# Altium PCB BREW_MONITOR.PcbDoc
Units mil, origin at the board's own origin, x right, y up, seen from the top; angles counter-clockwise.
Board outline 3680 x 1750 mil, 2 copper layers (Top Layer, Bottom Layer); 56 components, 50 nets, 168 pads, 11 vias.
Unrouted connection lines stored in the file: 36.
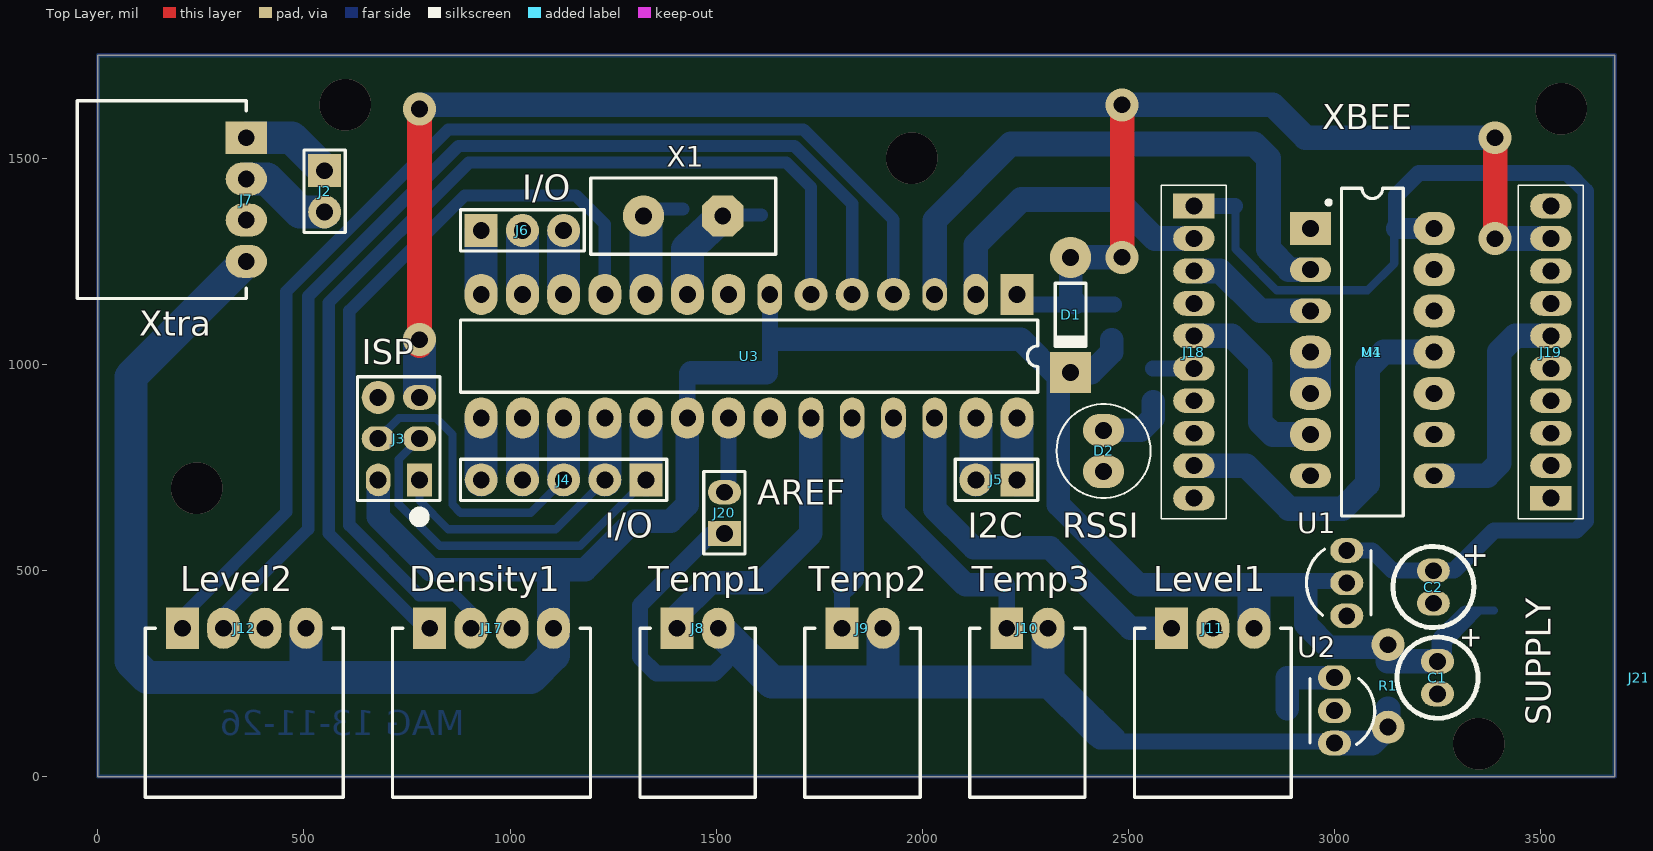
[diagram p0: Top Layer view]
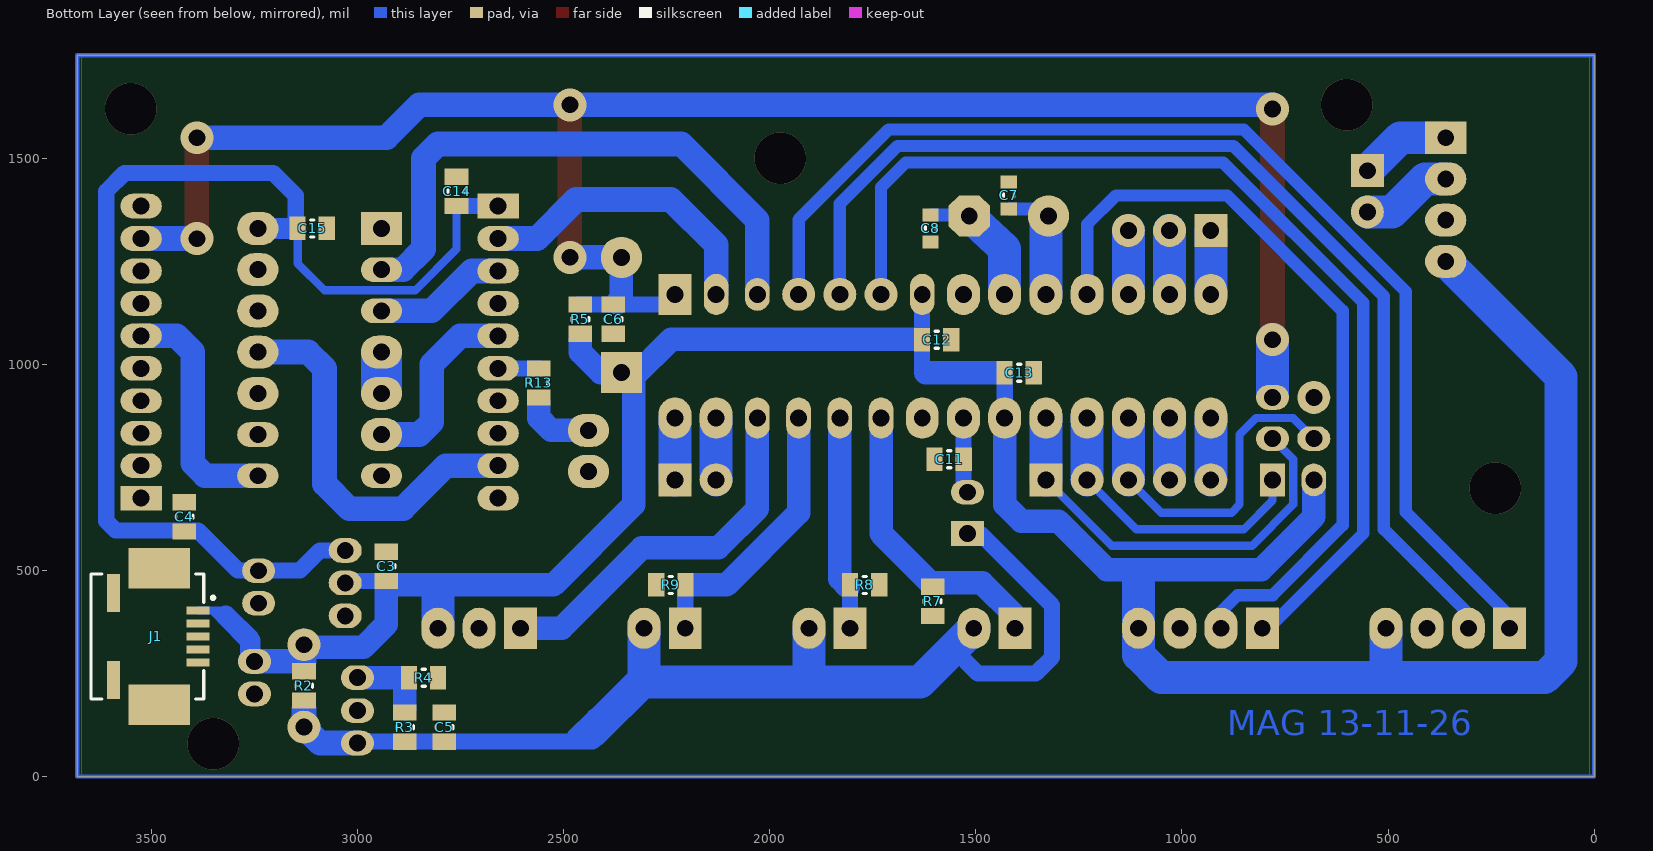
[diagram p1: Bottom Layer view, seen from below]

## Layer stack, top to bottom
Top Layer: signal copper 1.4
Dielectric: dielectric 12.6, FR-4, Dk 4.8
Bottom Layer: signal copper 1.4

## Board outline
0,0 0,1750 3680,1750 3680,0

## Design rules (kind name [scope] priority, off if disabled: settings)
Clearance Clearance_Exception [InComponent('J2')] p1: gap=10
Clearance [All] p2: gap=9
HoleSize [All] p1: absolutevalues=TRUE maxlimit=125 minlimit=10 maxpercent=80.000 minpercent=20.000
MinimumSolderMaskSliver MinimumSolderMaskSliver_Exception [InComponent('J1')] p1: minsoldermaskwidth=3
MinimumSolderMaskSliver [All] p2: minsoldermaskwidth=10
PlaneConnect [All] p1: planeconnectstyle=Relief reliefexpansion=20 reliefentries=4 reliefconductorwidth=20 reliefairgap=10
PolygonConnect [All] p1: connectstyle=Relief reliefconductorwidth=20 reliefentries=4 polygonreliefangle="90 Angle"
RoutingVias [All] p1: holewidth=41 width=50 viastyle="Through Hole" minholewidth=28 minwidth=40 maxholewidth=200 maxwidth=200
SilkToSilkClearance [All] p1: silktosilkclearance=5
SilkscreenOverComponentPads SilkscreenOverComponentPads_Res [InComponent('R*') OR InComponent('U2')] p1: minsilkscreentomaskgap=0
SilkscreenOverComponentPads [All] p2: minsilkscreentomaskgap=5
SolderMaskExpansion [All] p1: expansion=4
Width [All] p1: maxlimit=100 minlimit=10 preferedwidth=19.68
23 further rules are at their usual default settings.

## Components (designator, comment, footprint, x,y, rotation, side; value= is the part's Value field where it differs from the comment)
C1 "10uF, 35V" CAP_RAD-2.0 3250,240 r270 top
C2 "100uF, 25V" CAP_RAD-2.0 3240,460 r270 top
C3 "100nF, 50V" "0805 (2012 Metric)" 2930,510 r90 bottom
C4 "100nF, 50V" "0805 (2012 Metric)" 3420,630 r90 bottom
C5 "100nF, 50V" "0805 (2012 Metric)" 2790,120 r90 bottom
C6 "100nF, 50V" "0805 (2012 Metric)" 2380,1110 r270 bottom
C7 "20pF, 50V" "0603 (1608 Metric)" 1420,1410 r90 bottom
C8 "20pF, 50V" "0603 (1608 Metric)" 1610,1330 r270 bottom
C11 "100nF, 50V" "0805 (2012 Metric)" 1565,770 r0 bottom
C12 "100nF, 50V" "0805 (2012 Metric)" 1595,1060 r180 bottom
C13 "100nF, 50V" "0805 (2012 Metric)" 1395,980 r180 bottom
C14 "100nF, 50V" "0805 (2012 Metric)" 2760,1420 r90 bottom
C15 "100nF, 50V" "0805 (2012 Metric)" 3110,1330 r180 bottom
D1 "1N4148" DO-35 2360,1120 r270 top
D2 "LED (Yellow)" LED-1 2440,790 r90 top
J1 "USB-mini B" CON_USB-UX60SC 3510,340 r270 bottom
J2 "HDR-1X2" HDR1X2#1 550,1470 r270 top
J3 "HDR-2X3" HDR2X3 780,720 r90 top
J4 "HDR-1X5" HDR1X5 1330,720 r180 top
J5 "HDR-1X2" HDR1X2#1 2230,720 r180 top
J6 "HDR-1X3" HDR1X3 930,1325 r0 top
J7 "HDR-1X4" "HDR1X4_RA POL_SHR_TE" 360,1550 r270 top
J8 "HDR-1X2" "HDR1X2_RA POL_SHR_TE" 1405,360 r0 top
J9 "HDR-1X2" "HDR1X2_RA POL_SHR_TE" 1805,360 r0 top
J10 "HDR-1X2" "HDR1X2_RA POL_SHR_TE" 2205,360 r0 top
J11 "HDR-1X3" "HDR1X3_RA POL_SHR_TE" 2605,360 r0 top
J12 "HDR-1X4" "HDR1X4_RA POL_SHR_TE" 205,360 r0 top
J13 "HOUS-2" NO_FOOT -505,-380 r90 top
J14 "HOUS-2" NO_FOOT -285,-380 r90 top
J15 "HOUS-2" NO_FOOT -65,-380 r90 top
J16 "HOUS-3" NO_FOOT 155,-380 r90 top
J17 "HDR-1X4" "HDR1X4_RA POL_SHR_TE" 805,360 r0 top
J18 "SOC-1X10" "SOC1X10 2MM" 2658.9,1384.25 r0 top
J19 "SOC-1X10" "SOC1X10 2MM" 3525.04,675.59 r180 top
J20 "HDR-1X2" HDR1X2#2 1520,590 r90 top
J21 "HOUS-4" NO_FOOT 3740,240 r90 top
J22 "HOUS-4" NO_FOOT 3950,240 r90 top
J23 "HOUS-4" NO_FOOT 4180,240 r90 top
M1 "XBee" XBEE-20 3090,1030 r0 top
R1 "0R" JPR-0.2 3130,220 r270 top
R2 "1K, 1%" "0805 (2012 Metric)" 3130,220 r90 bottom
R3 "10K, 0.1%" "0805 (2012 Metric)" 2885,120 r90 bottom
R4 "10K, 0.1%" "0805 (2012 Metric)" 2840,240 r180 bottom
R5 "10K, 5%" "0805 (2012 Metric)" 2460,1110 r90 bottom
R7 "10K, 0.1%" "0805 (2012 Metric)" 1605,425 r270 bottom
R8 "10K, 0.1%" "0805 (2012 Metric)" 1770,465 r180 bottom
R9 "10K, 0.1%" "0805 (2012 Metric)" 2240,465 r0 bottom
R10 "USP10973" NO_FOOT 595,-380 r90 top
R11 "USP10973" NO_FOOT 815,-380 r90 top
R12 "USP10973" NO_FOOT 445,-210 r90 top
R13 "150R, 1%" "0805 (2012 Metric)" 2560,955 r270 bottom
U1 "MCP1700" TO-92A_L 3030,470 r0 top
U2 "TL431" TO-92A_L 3000,160 r180 top
U3 "ATMEGA328P" DIP-28 1580,1020 r180 top
U4 "74HC125" DIP-14 3091.97,1029.92 r0 top
X1 "16MHz" HC49U 1420,1360 r180 top

## Footprints (in the part's own frame and the unit in brackets; to place one, negate y for a bottom-side part, rotate by r counter-clockwise, add the part's x,y. Pads: shape width x height; smd on the part's side, far side on the other; paste and mask are expansions set on the pad)
"0603 (1608 Metric)" [mm] "0.063\" L x 0.031\" W (1.60mm x 0.80mm)"
  rect 0.8x1 smd: 1(-0.826,0) 2(0.826,0)
  silkscreen extent -0.1,-0.33 0.1,0.35, body extent -0.84,-0.43 0.86,0.43, height 0.9
"0805 (2012 Metric)" [mm] "0.079\" L x 0.049\" W (2.00mm x 1.25mm)"
  rect 1x1.45 smd: 1(-0.9,0) 2(0.9,0)
  silkscreen extent -0.1,-0.53 0.1,0.53, body extent -1.03,-0.64 1,0.63, height 0.65
CAP_RAD-2.0 [mil] "CAP ALUM RADIAL 2MM"
  oval 60x80 hole 41: 1(-39.37,0) 2(39.37,0)
  silkscreen extent -98,-98 98,98, body extent -98,-98 98,98, height 551
CON_USB-UX60SC [mm]
  rect 0.5x1.4 smd mask+0.076: 1(-1.6,3.125) 2(-0.8,3.125) 3(0,3.125) 4(0.8,3.125) 5(1.6,3.125)
  rect 2.5x3.8 smd mask+0.076: MH1(-4.2,0.725) MH2(4.2,0.725)
  rect 2.35x0.8 smd mask+0.076: MH3(-2.675,-2.075) MH4(2.675,-2.075)
  Top Layer pour cut-out: -2.95,-2.975 2.95,-2.975 2.95,-2.475 1.5,-2.475 1.5,-1.675 2.95,-1.675 2.95,-0.875 1.5,-0.875 1.5,0.625 -1.5,0.625 -1.5,-0.875 -2.95,-0.875 -2.95,-1.675 -1.5,-1.675 -1.5,-2.475 -2.95,-2.475
  silkscreen extent -3.85,-3.47 3.85,4.15, body extent -5.35,-5.77 5.35,3.43, height 3.95
DIP-14 [mil] "DIP; 14 Leads; Row Spacing 7.62 mm; Pitch 2.54 mm"
  rect 100x80 hole 41: 1(-150,300)
  oval 100x60 hole 41: 2(-150,200) 3(-150,100) 7(-150,-300) 8(150,-300) 9(150,-200)
  oval 100x80 hole 41: 4(-150,0) 5(-150,-100) 6(-150,-200) 10(150,-100) 11(150,0) 12(150,100) 13(150,200) 14(150,300)
  silkscreen extent -111,-398 75,398, body extent -142,-398 142,398, height 200
DIP-28 [mil] "DIP; 28 Leads; Row Spacing 7.62 mm; Pitch 2.54 mm"
  rect 80x100 hole 41: 1(-650,-150)
  oval 60x100 hole 41: 2(-550,-150) 7(-50,-150) 23(-150,150) 24(-250,150) 25(-350,150) 26(-450,150)
  oval 60x80 hole 41: 3(-450,-150)
  round 80 hole 41: 4(-350,-150) 5(-250,-150) 6(-150,-150)
  oval 80x100 hole 41: 8(50,-150) 9(150,-150) 10(250,-150) 11(350,-150) 12(450,-150) 13(550,-150) 14(650,-150) 15(650,150) 16(550,150) 17(450,150) 18(350,150) 19(250,150) 20(150,150) 21(50,150) 22(-50,150) 27(-550,150) 28(-650,150)
  silkscreen extent -700,-88 700,88, body extent -700,-142 700,142, height 210
DO-35 [mil] "Diode, Axial; Body 3.8 x 1.9 mm (LxDia. max), Lead Dia. 0.53 mm (max)"
  round 100 hole 41: 1(-139.76,0)
  rect 100x100 hole 41: 2(139.76,0)
  silkscreen extent -77,-37 81,37, body extent -149,-34 150,34, height 68
HC49U [mil] "Quartz Crystal, Thru-Hole; 2 Leads; Body 11.35 x 4.65 x 13.46 mm (LxWxH max)"
  oct 100x100 hole 41: 1(-96.06,0)
  round 100 hole 41: 2(96.06,0)
  silkscreen extent -224,-93 224,93, body extent -220,-90 220,90, height 530
HDR1X2#1 [mil] "Connector; Header; 2 Position"
  rect 80x80 hole 41: 1(0,0)
  round 80 hole 41: 2(100,0)
  silkscreen extent -50,-50 150,50, body extent -50,-50 150,50, height 395
HDR1X2#2 [mil] "Connector; Header; 2 Position"
  rect 60x80 hole 41: 1(0,0)
  oval 60x80 hole 41: 2(100,0)
  silkscreen extent -50,-50 150,50, body extent -50,-50 150,50, height 395
"HDR1X2_RA POL_SHR_TE" [mil] "Friction Lock"
  rect 80x100 hole 41: 1(0,0)
  oval 80x100 hole 41: 2(100,0)
  silkscreen extent -90,-410 190,0, body extent -90,-410 190,50, height 313
HDR1X3 [mil] "Connector; Header; 3 Position"
  rect 80x80 hole 41: 1(0,0)
  round 80 hole 41: 2(100,0) 3(200,0)
  silkscreen extent -50,-50 250,50, body extent -50,-50 250,50, height 395
"HDR1X3_RA POL_SHR_TE" [mil] "Friction Lock"
  rect 80x100 hole 41: 1(0,0)
  oval 80x100 hole 41: 2(100,0) 3(200,0)
  silkscreen extent -90,-410 290,0, body extent -90,-410 290,50, height 313
"HDR1X4_RA POL_SHR_TE" [mil] "Friction Lock"
  rect 80x100 hole 41: 1(0,0)
  oval 80x100 hole 41: 2(100,0) 3(200,0) 4(300,0)
  silkscreen extent -90,-410 390,0, body extent -90,-410 390,50, height 313
HDR1X5 [mil] "Connector; Header; 5 Position"
  rect 80x80 hole 41: 1(0,0)
  round 80 hole 41: 2(100,0) 3(200,0) 4(300,0) 5(400,0)
  silkscreen extent -50,-50 450,50, body extent -50,-50 450,50, height 395
HDR2X3 [mil] "Connector; Header; 3x2 Position"
  rect 80x60 hole 41: 1(0,0)
  oval 80x60 hole 41: 2(0,100)
  oval 60x80 hole 41: 3(100,0) 4(100,100) 5(200,0)
  round 80 hole 41: 6(200,100)
  silkscreen extent -50,-50 250,150, body extent -50,-50 250,150, height 395
JPR-0.2 [mil] "Axial Device, Thru-Hole; 2 Leads; 0.2 in Pin Spacing"
  round 80 hole 41: 1(-100,0) 2(100,0)
  body extent -110,-10 110,10, height 46
LED-1 [mil] "LED; 2 Leads"
  oval 80x100 hole 41: 1(50,0) 2(-50,0)
  silkscreen extent -114,-114 114,114, body extent -113,-114 114,114, height 283
NO_FOOT [mil]
"SOC1X10 2MM" [mil] "CONN RCPT 2MM 10POS SGL VERT PCB"
  rect 100x60 hole 41: 1(0,0)
  oval 100x60 hole 41: 2(0,-78.74) 3(0,-157.48) 4(0,-236.22) 5(0,-314.96) 6(0,-393.7) 7(0,-472.44) 8(0,-551.18) 9(0,-629.92) 10(0,-708.66)
  silkscreen extent -79,-759 79,50, body extent -79,-760 79,51, height 180
TO-92A_L [mil] "TO, Flat Index; 3 In-Line, Axial Leads; Body Dia. 4.5mm; Leads 0.51 x 0.48 mm (max)"
  oval 80x60 hole 41: 1(0,-80) 2(0,0) 3(0,78.74)
  silkscreen extent -98,-78 59,81, body extent -89,-90 90,90, height 223
XBEE-20 [mil] "XBee 20 Leads; Row Spacing 22 mm; Pitch 2 mm"
  body extent -512,-453 512,634, height 940

## Part data
C1: library part ESK106M035AC3AA, "CAP ALUM 10UF 35V 20% RADIAL"
C2: library part ESK107M025AC3AA, "CAP ALUM 100UF 25V 20% RADIAL"
C3 C4 C5 C6 C11 C12 C13 C14 C15: library part C2012X7R1H104K085AA, "CAP CER 0.1UF 50V 10% X7R 0805"
C7 C8: library part CC0603JRNPO9BN200, "CAP CER 20PF 50V 5% NPO 0603"
D1: library part 1N4148TACT, "DIODE SMALL SIG 100V 0.2A DO35"
D2: library part LTL-307Y, "LED 5MM YELLOW DIFFUSED"
J1: library part UX60SC-MB-5ST(80), "CONN RCPT USB MINI B R/A SMD"
J2 J5 J20: library part PRPC002SAAN-RC, "CONN HEADER .100\" SNGL STR 2POS"
J3: library part XG8T-0631, "JUMPER PLUG 6POS DOUBLE ROW"
J4: library part PRPC005SAAN-RC, "CONN HEADER .100\" SNGL STR 5POS"
J6: library part PRPC003SAAN-RC, "CONN HEADER .100\" SNGL STR 3POS"
J7 J12 J17: library part 2-644488-4, "CONN HEADER RTANG 4POS .100 TIN"
J8 J9 J10: library part 2-644488-2, "CONN HEADER RTANG 2POS .100 TIN"
J11: library part 2-644488-3, "CONN HEADER RTANG 3POS .100 TIN"
J13 J14 J15: library part 3-644083-2, "CONN RCPT 2POS 22AWG POL MTA100"
J16: library part 3-644083-3, "CONN RCPT 3POS 22AWG POL MTA100"
J18 J19: library part 950510-6102-AR, "CONN SOCKET 10POS 2MM VERT T/H"
J21 J22 J23: library part 3-644083-4, "CONN RCPT 4POS 22AWG POL MTA100"
M1: library part XB24-AWI-001, "MODULE 802.15.4 1MW W/WIRE ANT"
R1: library part JUMPER, "RES 0R"
R2: library part RMCF0805FT1K00, "RES 1K OHM 1/8W 1% 0805"
R3 R4 R7 R8 R9: library part CRT0805-BY-1002ELF, "RES 10K OHM 1/8W .1% 0805 SMD"
R5: library part RMCF0805JT10K0, "RES 10K OHM 1/8W 5% 0805"
R10 R11 R12: "THERMISTOR ASSEMBLY 10K OHM"
R13: library part RMCF0805FT150R, "RES 150 OHM 1/8W 1% 0805"
U1: library part MCP1700-3302E/TO, "IC REG LDO 3.3V 0.25A TO92-3"
U2: library part TL431CZ, "IC VREF SHUNT PREC ADJ TO-92-3"
U3: library part ATMEGA328P-PU, "IC MCU 8BIT 32KB FLASH 28DIP"
U4: library part SN74AHC125N, "IC BUS BUFFER TRI-ST QD 14DIP"
X1: library part FOXLF160-20, "CRYSTAL16MHZ 20PF THRU"

## Via types
v1: diameter 80, hole 41, Top Layer to Bottom Layer, 6 vias
v2: diameter 125, hole 125, Top Layer to Bottom Layer, 3 vias
v3: diameter 125, hole 125, Top Layer to Bottom Layer, tented bottom, 2 vias

## Nets (pads, with @x,y where several pads share a name; then routed paths per layer and width w, separated by ;. In a path a pad name is that pad's centre, name@x,y a point inside that pad or via, vN(x,y) a via of type N, cw(c..) or ccw(c..) an arc to the next point about the centre after c; other vN are vias at no path point)
+3V3: C2.1 C4.1 C14.1 C15.1 J18.1 U1.3 U4.14 | length 2866
  Bottom Layer w20: C14.1 2760,1280 2860,1180 3080,1180 3145.43,1245.43 C15.1
  Bottom Layer w39.37: J18.1 C14.1@2758.82,1384.25 ; U1.3 3091.26,548.74 3140,500 3290,500 3387.06,597.06 3587.06,597.06 3610,620 3610,1420 3565.43,1464.57 3204.57,1464.57 3150,1410 C15.1@3150,1329.92
  Bottom Layer w50: C15.1@3150,1329.92 U4.14
+5V0: C1.1 C3.1 C12.1 C13.1 D1.2 J1.1 J3.2 J7.4 J11.3 J12.4 J17.4 R1.1 R2.2 R5.1 U1.2 U3.7 U3.20 | length 6944.7
  Bottom Layer w19.68: 3280,370 3312.99,402.99 J1.1 ; 3310,360 3350,400
  Bottom Layer w39.37: U3.20 C13.1@1430,979.57 ; 1630.43,980 U3.7@1630.43,1169.57 ; C3.1 U1.2@3025.43,474.57
  Bottom Layer w50: C1.1@3260,280 3260,330 3320,390
  Bottom Layer w57: 3130,280 R1.1
  Bottom Layer w57.09: J3.2 680,630 808,502 1182,502 1300,620 1390,620 1430,660 U3.20 ; C13.1@1440,980 1622,980 ; C12.1@1640,1060.63 2239.37,1060.63 2330,970 2330,660 2525,465 C3.1@2920,465 ; D1.2 2410.24,980.24 2460,1030 R5.1@2460,1060 ; 2930,450 2930,370 2986.46,313.54 R1.1@3130,313.54
  Bottom Layer w60: 3130,280 C1.1@3260,280
  Bottom Layer w80: J7.4 80,970 80,280 120,240 1050,240 1105,295 1105,490 ; 505,240 J12.4 ; J11.3 2805,450
"AD0 / DIO0": J19.10
"AD2 / DIO2": J19.8
"AD3 / DIO3": J19.7
"AD4 / DIO4": J19.1
ADC0: J8.1 R7.1 U3.23 | length 717.8
  Bottom Layer w39.37: J8.1 J8.1@1405,390
  Bottom Layer w57.09: J8.1@1405,390 1485,470 1610,470 1730,590 U3.23
ADC1: J9.1 R8.1 U3.24 | length 522.9
  Bottom Layer w39.37: J9.1@1805.43,360.43 R8.1
  Bottom Layer w57.09: R8.1@1810,460 1830,480 U3.24
ADC2: J10.1 R9.1 U3.25 | length 667.1
  Bottom Layer w39.37: J10.1 R9.1@2205,464.57
  Bottom Layer w57.09: U3.25 1930,640 2105,465 ; 2110,465 R9.1@2195,465
ADC3: J11.1 U3.26 | length 915.1
  Bottom Layer w57.09: U3.26 2030,650 2125,555 2310,555 2505,360 J11.1
ADC4: J5.2 U3.27 | length 150
  Bottom Layer w80: J5.2 U3.27
ADC5: J5.1 U3.28 | length 150
  Bottom Layer w80: J5.1 U3.28
AREF: C11.1 J20.2 U3.21 | length 180
  Bottom Layer w39.37: J20.2@1530,690 U3.21
"ASSOCIATE / AD5 / DIO5": J19.5
"C\T\S\ / DIO7": J19.2
"D\T\R\ / SLEEP_RQ / DI8": J18.9 U4.11 | length 947.7
  Bottom Layer w60: J18.9 2785.67,754.33 2890,650 3020,650 3080,710 3080,990 3119.92,1029.92 U4.11
DIN: J18.3 U4.3 | length 323.2
  Bottom Layer w60: J18.3 2723.23,1226.77 2820.08,1129.92 U4.3
DO8: J18.4
DOUT: J18.2 U3.2 | length 733.6
  Bottom Layer w60: U3.2 2130,1290 2240,1400 2470,1400 2564.49,1305.51 J18.2
DTR: U4.12
GND: C1.2 C2.2 C3.2 C4.2 C5.2 C6.2 C7.2 C8.2 C11.2 C12.2 C13.2 C14.2 C15.2 D2.2 J1.5 J1.MH1 J1.MH2 J1.MH3 J1.MH4 J3.6 J7.3 J11.2 J12.3 J17.3 J18.10 R4.2 R7.2 R8.2 R9.2 U1.1 U2.2 U3.8 U3.22 U4.1 U4.7 U4.10 U4.13
MISO: J3.1 J4.2 U3.18 | length 728.7
  Bottom Layer w20: J3.1 780,670 850,600 1110,600 J4.2
  Bottom Layer w80: J4.2 U3.18
MOSI: J3.4 J4.3 U3.17 | length 848.7
  Bottom Layer w20: J3.4 730,870 820,870 860,830 860,660 880,640 1050,640 J4.3
  Bottom Layer w80: J4.3 U3.17
NetC7_1: C7.1 U3.10 X1.2 | length 290.8
  Bottom Layer w31.5: X1.2@1330,1366.06 1341.44,1377.5 C7.1
  Bottom Layer w80: U3.10 X1.2@1330,1366.06
NetC8_1: C8.1 U3.9 X1.1 | length 322.6
  Bottom Layer w31.5: X1.1@1518.13,1362.5 C8.1
  Bottom Layer w80: U3.9 1430,1280 X1.1@1518.13,1362.5
NetD2_1: D2.1 R13.2 | length 182.4
  Bottom Layer w57.09: D2.1@2430,840 2530,840 2560,870 R13.2@2560,910
NetJ2_1: J2.1 J7.1 | length 223.1
  Bottom Layer w80: J7.1 470,1550 J2.1
NetJ2_2: J2.2 J7.2 | length 223.1
  Bottom Layer w80: J7.2 410,1450 490,1370 J2.2
NetR3_2: R3.2 R4.1 U2.1 | length 180
  Bottom Layer w57.09: R3.2@2885,165 R4.1@2885,230 ; R4.1@2885,240 U2.1
"ON / SLEEP": J19.3
PB0: J6.1 U3.14 | length 155
  Bottom Layer w80: U3.14 J6.1
PB1: J4.5 U3.15 | length 150
  Bottom Layer w80: J4.5 U3.15
PD2: J12.1 U3.4 | length 2829.1
  Bottom Layer w30: J12.1 205,390 456.97,641.97 456.97,1176.97 850,1570 1711.42,1570 1930,1351.42 U3.4
PD3: J12.2 U3.5 | length 2639.1
  Bottom Layer w30: J12.2 305,395 510,600 510,1165 875,1530 1690,1530 1830,1390 U3.5
PD4: J17.1 U3.6 | length 2488
  Bottom Layer w30: J17.1@795,355 560,590 560,1150 900,1490 1670,1490 1730,1430 U3.6
PD5: J17.2 U3.11 | length 1872
  Bottom Layer w30: 780,440 610,610 610,1130 890,1410 1160,1410 1230,1340 U3.11 ; 785,440 865,440 905,400 J17.2
PD6: J6.3 U3.12 | length 155
  Bottom Layer w80: U3.12 J6.3
PD7: J6.2 U3.13 | length 155
  Bottom Layer w80: U3.13 J6.2
"PWM0 / RSSI": J18.6 R13.1 | length 98.8
  Bottom Layer w39.37: R13.1 J18.6@2658.78,990.43
PWM1: J18.7
R\T\S\: J19.6 U4.8 | length 581.8
  Bottom Layer w60: U4.8 3369.92,729.92 3400,760 3400,1030 3439.29,1069.29 J19.6
RESET: J18.5 U4.6 | length 464.2
  Bottom Layer w60: J18.5 2750.71,1069.29 2820,1000 2820,860 2850.08,829.92 U4.6
RST: C6.1 D1.1 J3.5 J19.9 R5.2 U3.1 | length 4497.8
  Top Layer w60: v1@780,1045 v1(780,1620) ; v1(2485,1260) v1@2485,1625 ; v1(3390,1305) v1(3390,1550)
  Bottom Layer w39.37: U3.1@2254.57,1145.43 C6.1 R5.2@2465.43,1145.43
  Bottom Layer w57.09: C6.1@2360,1160 C6.1@2370,1150 ; 2360,1165.43 D1.1
  Bottom Layer w60: v1@780,1630 v1@2470,1630 ; D1.1 v1@2484.76,1259.76 ; v1@2500,1630 2850,1630 2930,1550 v1(3390,1550) ; v1@3394.49,1305.51 J19.9
  Bottom Layer w80: J3.5@780,935 v1(780,1060)
  other v1: 2485,1630
RST_XB: U4.4 U4.5 | length 80
  Bottom Layer w100: U4.5@2941.97,940 U4.4@2941.97,1020
RTS: U4.9
SCK: J3.3 J4.1 U3.19 | length 1038.4
  Bottom Layer w20: J3.3 730,770 730,660 830,560 1170,560 J4.1
  Bottom Layer w80: J4.1 U3.19
SS: J4.4 U3.16 | length 150
  Bottom Layer w80: J4.4 U3.16
TXD: U3.3 U4.2 | length 1423.8
  Bottom Layer w60: U3.3 2030,1350 2215,1535 2805,1535 2840,1500 2840,1280 2890.08,1229.92 U4.2
VREF: J19.4
VREF_+5V0: C5.1 J8.2 J9.2 J10.2 J20.1 R1.2 R2.1 R3.1 U2.3 | length 2838.3
  Bottom Layer w39.37: J20.1 1490,590 1315,415 1315,290 1355,250 1495,250 1555,310 ; 2405,110 2430,85 R3.1@2875,85 ; 2425,145 2475,95 ; R3.1@2875,85.43 U2.3@3000,85.43
  Bottom Layer w60: U2.3 3091.26,81.26 R1.2 3130,164.57
  Bottom Layer w80: J8.2 1555,310 1635,230 2300,230 2305,235 ; 1905,230 J9.2 ; J10.2 2305,235 ; 2430,110 2305,235
pads on no net: J1.2 J1.3 J1.4 J18.8
copper on no net: | length 10860
  Bottom Layer w10: 0,0 3680,0 3680,1750 0,1750 0,0
  other v2: 240,700 3550,1620 600,1630
  other v3: 3350,80 1975,1500

## Polygon pours and split planes (outlines as drawn)
GND on Bottom Layer "GND_Plane" (solid, remove dead copper, shelved, pour order 2): 10,0 10,1750 3670,1750 3670,0

## Other copper
Bottom Layer:
  text "MAG 13-11-26" at 890,100 h60

## Silkscreen, mask and mechanical layers (free items; w line width, h text height)
Top Overlay:
  circle w30: c780,630 r10
  text "XBEE" at 2970,1570 h60
  text "I/O" at 1030,1400 h60
  text "Xtra" at 100,1070 h60
  text "ISP" at 640,1000 h60
  text "AREF" at 1600,660 h60
  text "I/O" at 1230,580 h60
  text "I2C" at 2110,580 h60
  text "RSSI" at 2340,580 h60
  text "Level2" at 200,450 h60
  text "Density1" at 755,450 h60
  text "Temp1" at 1335,450 h60
  text "Temp2" at 1725,450 h60
  text "Temp3" at 2120,450 h60
  text "Level1" at 2560,450 h60
  text "SUPPLY" at 3525,125 h60 r90
Mechanical 1:
  lines w10: -5,0 ccw(c0,0) 0,-5 ; -5,0 ccw(c0,0) 0,-5 ; -5,0 -5,1750 ; -5,1750 cw(c0,1750) 0,1755 ; -5,1750 cw(c0,1750) 0,1755 ; 0,-5 3680,-5 ; 0,1755 3680,1755 ; 3680,-5 ccw(c3680,0) 3685,0 ; 3680,-5 ccw(c3680,0) 3685,0 ; 3680,1755 cw(c3680,1750) 3685,1750 ; 3680,1755 cw(c3680,1750) 3685,1750 ; 3685,0 3685,1750

## Text inside footprints (layer, text, board x,y; h text height)
C1: Top Overlay "+" at 3310,365 h50 r270
C2: Top Overlay "+" at 3317.93,570 h59.06 r270